# EAGLE board tiny13_charlie4_50mm_boosted_optical_diag_thin (EAGLE 6.2)
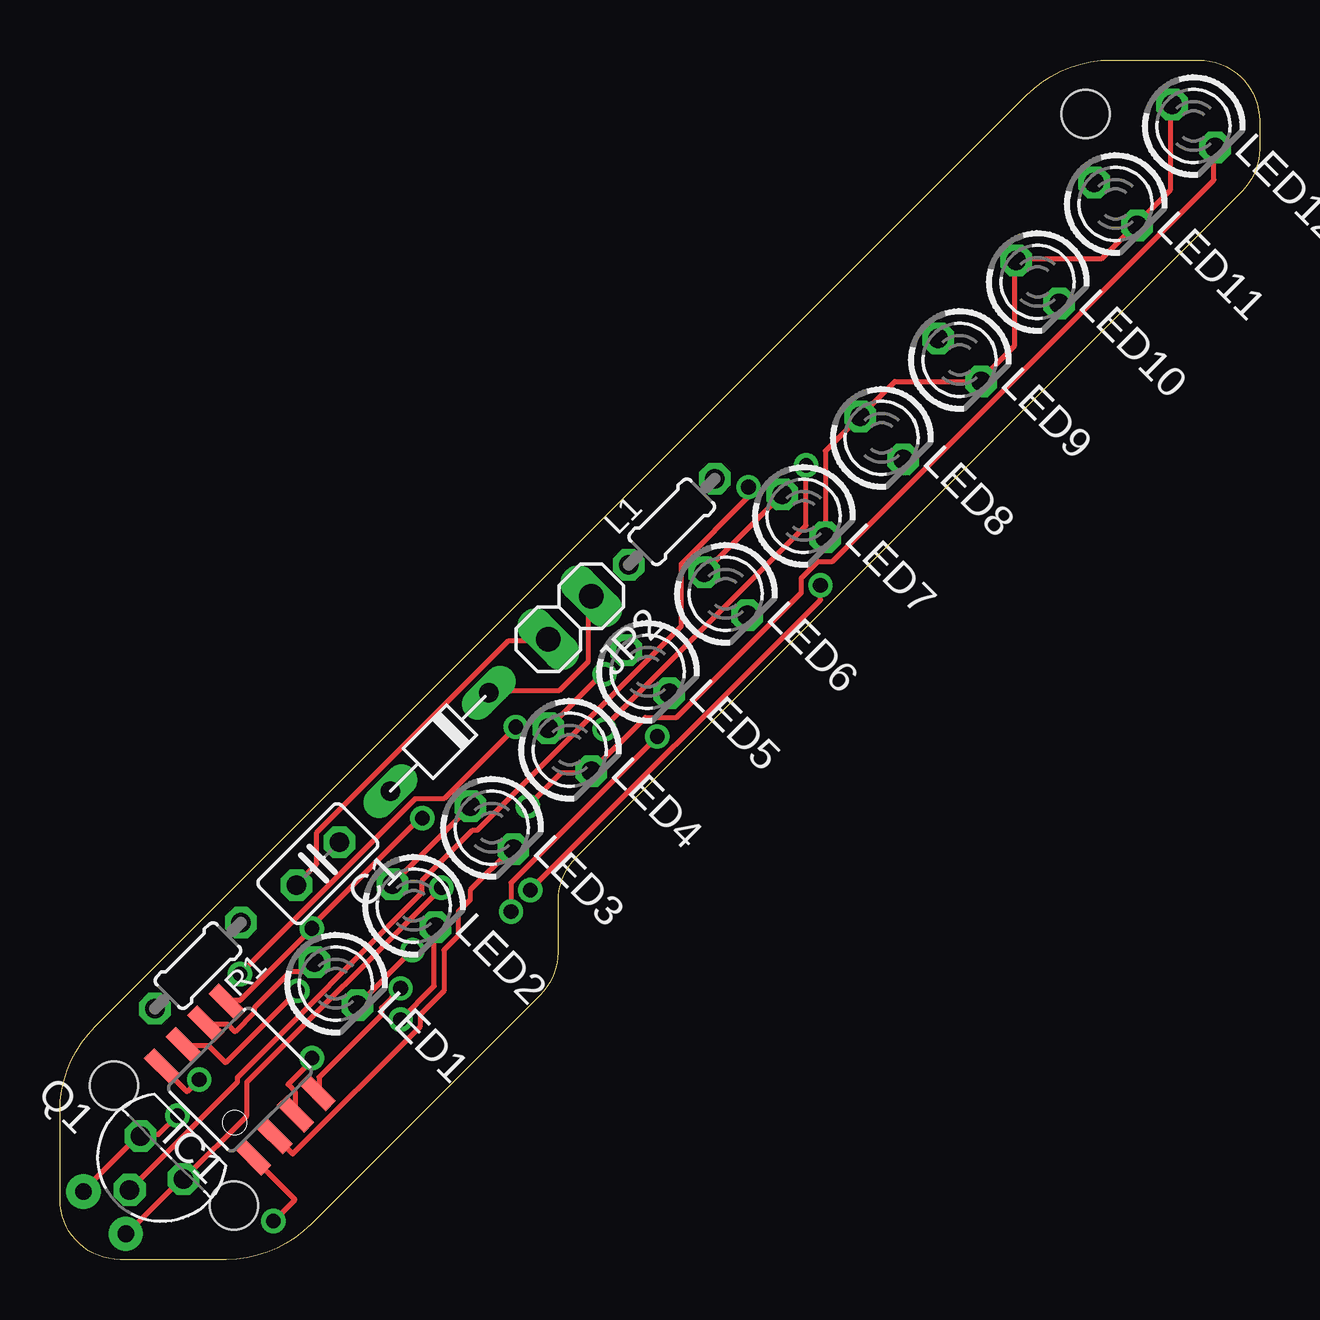
[diagram p0: board, top side]
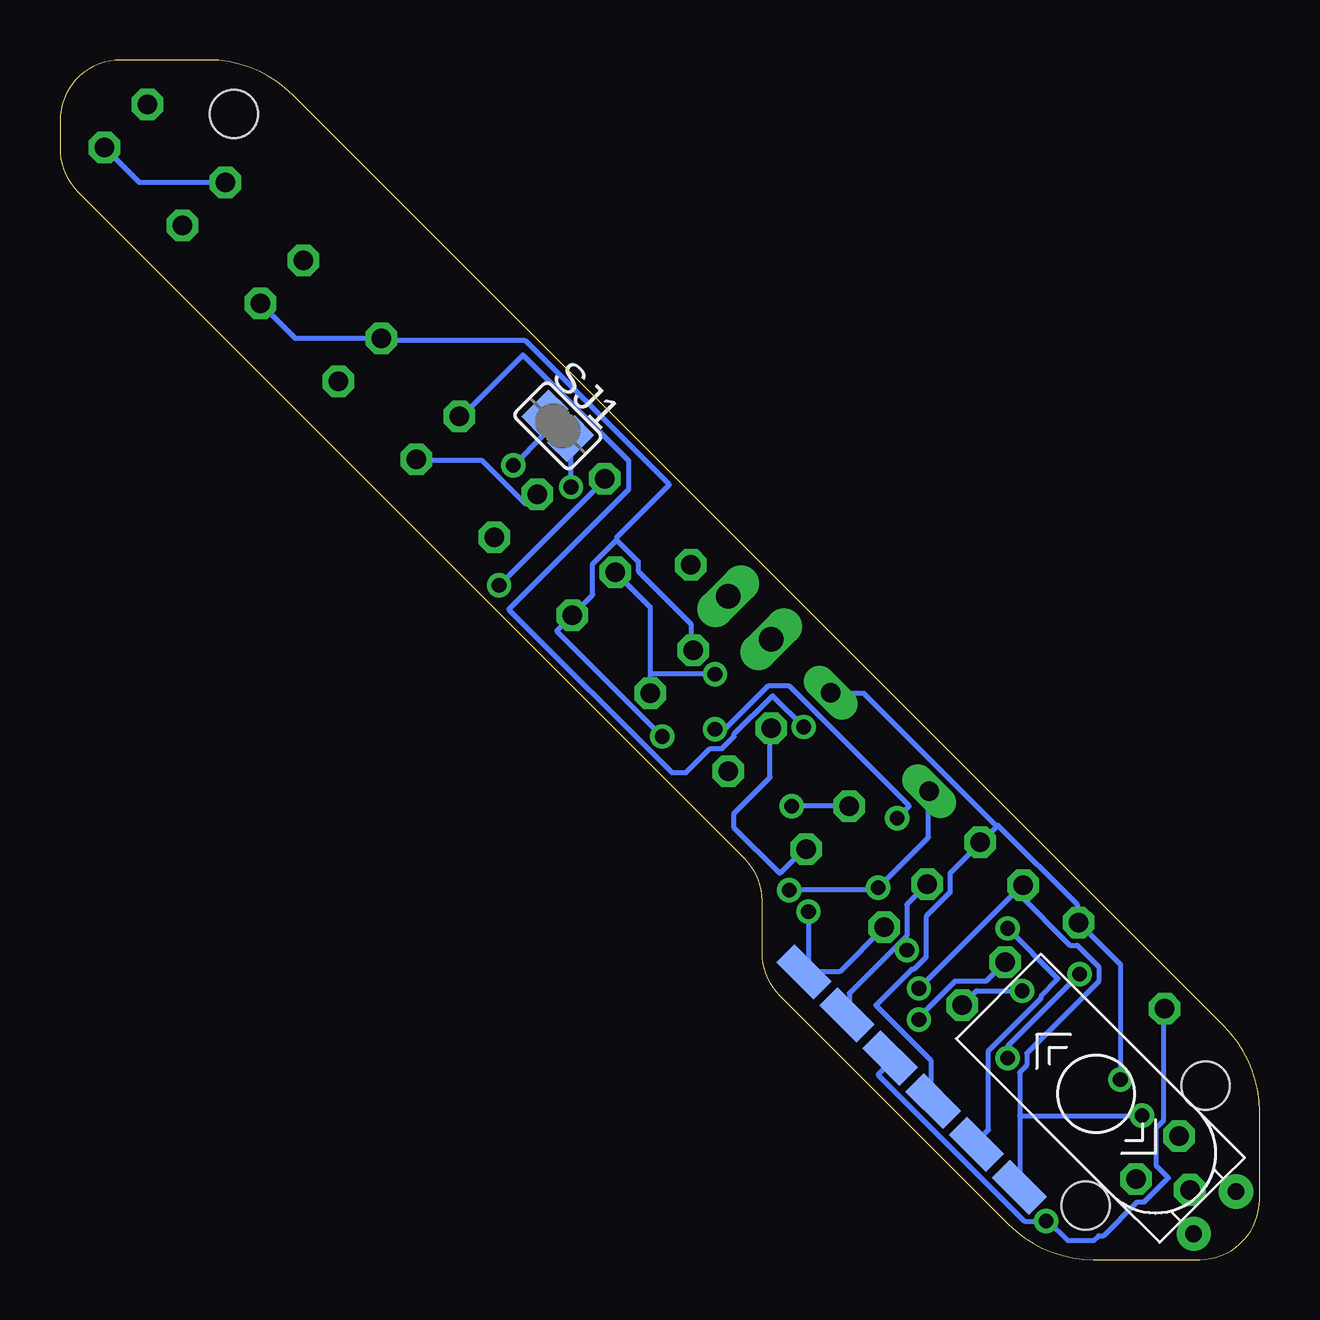
[diagram p1: board, bottom side, seen from below]

Size 50 x 50 mm. Coordinates in mm from the lower left corner, seen from the top.
Outline: 43.82,50 47.46,50 arc-90 50,47.46 50,46.3 arc-45 49.26,44.51 21.49,16.74 arc45 20.75,14.95 20.75,12.8 arc-45 20.01,11.01 10.46,1.46 arc-45 6.93,0 2.5,0 arc-90 0,2.5 0,6.18 arc-45 1.46,9.71 40.29,48.54 arc-45 43.82,50
Copper layers (1*16): Top 0.035mm / dielectric 1.5mm / Bottom 0.035mm
Design rules: minimum track width 8mil, minimum drill 24mil, track to track 6mil, track to pad 6mil, pad to pad 6mil, via to via 6mil, smd to smd 0mil, copper to edge 10mil, drill to drill 8mil, minimum pad ring 10mil, minimum via ring 8mil, stop-mask expansion 4mil, vias tented up to drill 0mil, thermal gap 10mil
Holes 2 mm at 42.75,47.75 7.25,2.25 2.25,7.25

## Footprints (pad centres in the part's own frame; a part is rotated, then mirrored left to right if it is on the bottom)
C025-025X050 = drill 0.813 octagon: 1 -1.27,0; 2 1.27,0
8S1 = smd 0.6 x 1.6: 1 -1.905,-2.654; 2 -0.645,-2.654; 3 0.625,-2.654; 4 1.895,-2.654; 5 1.905,2.654; 6 0.635,2.654; 7 -0.635,2.654; 8 -1.905,2.654
1X02 = drill 1.016 long: 1 -1.27,0; 2 1.27,0
0204/5 = drill 0.813 octagon: 1 -2.54,0; 2 2.54,0
LED3MM = drill 0.813 octagon: A -1.27,0; K 1.27,0
TO92 = drill 0.813 octagon: 1 1.27,0; 2 0,1.905; 3 -1.27,0
SJ = smd 1.168 x 1.6: 1 -0.762,0; 2 0.762,0
TILT_SWITCH_MECHANICAL = drill 0.7 pad 1.422: P$1 -0.75,1.25; P$2 -0.75,3.75
CONTACT_ISP_PROGRAMMER_1X6_ATMEL_2 = smd 2.184 x 1.067: GND 6.35,0; MISO -6.35,0; MOSI 3.81,0; RST -1.27,0; SCK -3.81,0; VCC 1.27,0
D-7.5 = drill 0.813 long: A 2.81,0; C -3,0

## Placement (x,y rotation side)
C1  [C025-025X050]  10.75,16.5 225 top
IC1  TINY13-20SSU  [8S1]  7.5,7.5 45 top
JP2  [1X02]  21.25,26.75 225 top
L1  [0204/5]  25.5,30.75 45 top
LED1  [LED3MM]  11.5,11.5 315 top
LED2  [LED3MM]  14.75,14.75 315 top
LED3  [LED3MM]  18,18 315 top
LED4  [LED3MM]  21.25,21.25 315 top
LED5  [LED3MM]  24.5,24.5 315 top
LED6  [LED3MM]  27.75,27.75 315 top
LED7  [LED3MM]  31,31 315 top
LED8  [LED3MM]  34.25,34.25 315 top
LED9  [LED3MM]  37.5,37.5 315 top
LED10  [LED3MM]  40.75,40.75 315 top
LED11  [LED3MM]  44,44 315 top
LED12  [LED3MM]  47.25,47.25 315 top
Q1  BSS101  [TO92]  4.25,4.25 135 top
R1  [0204/5]  5.75,12.25 225 top
SJ1  [SJ]  29.25,34.75 315 bottom
U$1  TILT_SWITCH_MECHANICAL  [TILT_SWITCH_MECHANICAL]  0.62,4.25 135 bottom
U$2  AVR_ISP_6_PIN_1X6_SMT_CONTACT_PROGRAMMER  [CONTACT_ISP_PROGRAMMER_1X6_ATMEL_2]  14.5,7.5 315 bottom
U$3  D-6  [D-7.5]  15.75,21.5 225 top

## Library data of the parts
C1 R1 = resistor
IC1 = atmel; MPN: ATTINY13-20SSU; OC_FARNELL: 1455133; OC_NEWARK: 58M3771
JP2 = pinhead
L1 = rcl
LED1-LED12 = 0-svo
Q1 = transistor-fet
SJ1 = jumper
U$1-U$3 = Mrule

## Nets
GND: C1.2 IC1.4 JP2.2 Q1.1 U$1.P$1 U$2.GND
N$1: IC1.2 LED3.K LED4.A LED5.K LED6.A LED7.A LED8.K
N$2: IC1.7 LED1.K LED2.A LED3.A LED4.K LED11.A LED12.K U$2.SCK
N$3: L1.2 Q1.3 U$1.P$2 U$3.A
N$4: IC1.3 LED7.K LED8.A LED9.K LED10.A LED11.K LED12.A
N$5: IC1.5 SJ1.1 U$2.MOSI
N$6: IC1.1 R1.2 U$2.RST
N$8: IC1.6 LED1.A LED2.K LED5.A LED6.K LED9.A LED10.K U$2.MISO
N$9: Q1.2 SJ1.2
N$11: L1.1
VCC: C1.1 IC1.8 JP2.1 R1.1 U$2.VCC U$3.C

## Tracks (layer width: path | path; a pad name or v marks a point on that pad's centre or on a via)
GND  (via drill 0.61)
  Top 0.203: U$1.P$1 1,2.9 3.2,5.1 3.3,5.1 Q1.1 3.4,5.2 4.1,5.2 v4.9,6 | v14.2,11.3 13.4,10.5 13.4,10.2 10.8,7.6 10.8,7 IC1.4 | JP2.2 20.3,25.8 18.7,25.8 10.7,17.8 10.7,16.5 9.9,15.7 C1.2
  Bottom 0.203: v14.2,11.3 9.9,15.6 C1.2 10.1,15.3 7.9,13.1 7.6,13.1 6.7,12.2 6.7,11.6 9.7,8.6 9.7,8.1 10,7.8 10,6 | 10,6 10,3.1 U$2.GND | 10,6 v4.9,6
N$1  (via drill 0.61)
  Top 0.203: LED7.A 30.1,31.8 30,31.8 26.9,28.7 LED6.A | IC1.2 9,5.1 9.7,4.4 15,9.7 15,10.2 16,11.2 16,12.9 16.6,13.5 16.6,14.5 17.1,15 17.1,15.4 18.8,17.1 LED3.K | v22.7,24.4 22.6,24.4 20.4,22.2 LED4.A
  Bottom 0.203: 25.4,24.4 25.4,27.2 26.8,28.6 LED6.A | 25.4,24.4 25.4,23.7 LED5.K | LED8.K 35.1,33.3 32.4,33.3 30.6,31.5 30.2,31.9 LED7.A | LED4.A 20.4,22.1 20.4,20.1 21.9,18.6 21.9,18 20,16.1 18.9,17.2 LED3.K | v22.7,24.4 25.4,24.4
N$2  (via drill 0.61)
  Top 0.203: v9.9,11.2 6.9,8.2 6.2,8.9 5.2,8.9 IC1.7 | LED3.A 17.1,18.8 17,18.8 13.9,15.7 LED2.A | v19.5,18.9 20.9,20.3 22.1,20.3 LED4.K 22.2,20.4 24.4,22.6 25.7,22.6 30.9,27.8 30.9,28.4 31.6,29.1 32.2,29.1 48.1,45 48.1,46.3 LED12.K | v14.7,12.9 12.5,10.7 12.4,10.7 LED1.K
  Bottom 0.203: v9.9,11.2 11.8,11.2 12.3,10.7 LED1.K | LED11.A 43.2,44.9 46.7,44.9 48.1,46.3 LED12.K | 15,13.2 14.7,13.5 14.7,14.8 13.9,15.6 LED2.A | 15,13.2 17.1,11.1 17.1,10.2 U$2.SCK | v19.5,18.9 17.2,18.9 LED3.A | 15,13.2 v14.7,12.9
N$3  (via drill 0.61)
  Top 0.203: U$1.P$2 2.8,1.1 5,3.3 5.1,3.3 Q1.3 5.2,3.4 7.8,6 7.8,7.4 v15.9,15.5 | v31.7,28.1 31.7,27.5 v19.6,15.4
  Bottom 0.203: U$3.A 13.8,19.5 13.8,17.6 v15.9,15.5 16,15.5 16.1,15.4 v19.6,15.4 | v31.7,28.1 27.3,32.5 L1.2
N$4  (via drill 0.61)
  Top 0.203: LED12.A 46.3,48.1 46.3,44.6 44.9,43.2 LED11.K 44.8,43.1 43.4,41.7 39.9,41.7 LED10.A 39.8,41.6 39.8,38.1 38.4,36.7 LED9.K 38.3,36.6 34.8,36.6 33.4,35.2 LED8.A 33.3,35.1 31.9,33.7 31.9,30.2 LED7.K | v10.5,8.4 10.5,8.3 9.5,7.3 9.8,7 9.8,6.1 IC1.3 | v7.5,11.9 14.8,19.2 16,19.2 v19,22.2
  Bottom 0.203: v10.5,8.4 10.5,8.9 v7.5,11.9 | v19,22.2 20.3,23.5 21.9,21.9 21.9,21.8 22.4,21.3 22.9,21.3 23.9,20.3 24.5,20.3 31.3,27.1 26.3,32.1 26.3,33.3 30.7,37.7 33.3,35.1 LED8.A
N$5  (via drill 0.61)
  Top 0.203: IC1.5 7,10.8 7.5,10.8 v10.5,13.8 10.5,13.9 15,18.4 v15.1,18.4 | v31.1,33.1 31.1,30.6 22.7,22.2 v22.7,22.1
  Bottom 0.203: v10.5,13.8 8.4,11.7 9.1,11 9.1,10.9 11.3,8.7 11.3,5.4 11.8,4.9 U$2.MOSI | v31.1,33.1 29.8,34.4 29.8,35.2 SJ1.1 | v22.7,22.1 22.3,22.1 20.5,23.9 19.6,23.9 14.6,18.9 v15.1,18.4
N$6  (via drill 0.61)
  Top 0.203: v8.9,1.6 9.8,2.5 8.1,4.2 IC1.1
  Bottom 0.203: U$2.RST 15.3,8.3 15.9,7.7 9.8,1.6 v8.9,1.6 8.8,1.6 8,0.8 6.9,0.8 6.7,1 6.5,1 5.1,2.4 4.8,2.4 3.8,3.4 4.3,3.9 4.3,5.5 4,5.8 4,10.4 R1.2
N$8  (via drill 0.61)
  Top 0.203: IC1.6 6.1,9.8 7,9.8 7.3,9.5 8.1,10.3 8.1,10.5 9.6,12 10.3,12 10.6,12.3 LED1.A | v14.2,10 15.6,11.4 15.6,13.8 LED2.K | v18.8,14.5 18.8,15.7 v24.9,21.8
  Bottom 0.203: LED2.K 15.7,13.8 17.5,12 18.9,12 U$2.MISO 18.8,12.1 v18.8,14.5 | v14.2,10 14.2,10.1 12.7,11.6 11.4,11.6 10.7,12.3 LED1.A | LED10.K 41.6,39.8 40.2,38.4 36.7,38.4 LED9.A 36.6,38.3 30.6,38.3 24.6,32.3 26.8,30.1 26.8,30 | 26.8,30 25.9,29.1 25.9,28.7 23.7,26.5 23.7,25.4 LED5.A | 26.8,30 27.8,29 27.8,27.7 28.6,26.9 LED6.K 28.7,26.8 29.3,26.2 v24.9,21.8
N$9  (via drill 0.61)
  Top 0.203: v28.7,32.2 28.7,31.8 25.9,29 25.9,26.4 17.4,17.9 17.2,17.9 15.1,15.8 15.1,15.3 7.4,7.6 7.4,7.4 Q1.2
  Bottom 0.203: v28.7,32.2 SJ1.2
VCC  (via drill 0.61)
  Top 0.203: JP2.1 22,27.5 22,24.9 20.8,23.7 17.9,23.7 U$3.C | v5.8,7.5 5.3,7 4.3,8 IC1.8
  Bottom 0.203: v5.8,7.5 5.8,12.3 R1.1 7.6,14.1 7.6,14.8 10.9,18.1 | U$2.VCC 13.7,6.7 13.7,8.3 16,10.6 14.5,12.1 14.4,12.1 13.9,12.6 13.9,14.3 12.9,15.3 12.9,16.1 11.7,17.3 C1.1 11.6,17.4 10.9,18.1 | U$3.C 17.8,23.6 16.5,23.6 11,18.1 10.9,18.1